# Altium PCB LEO_COTS.PcbDoc
Units mm, origin at the board's own origin, x right, y up, seen from the top; angles counter-clockwise.
Board outline 36 x 10 mm, 2 copper layers (Top Layer, Bottom Layer), stack 0.376 mm thick; 19 components, 18 nets, 99 pads, 14 vias.
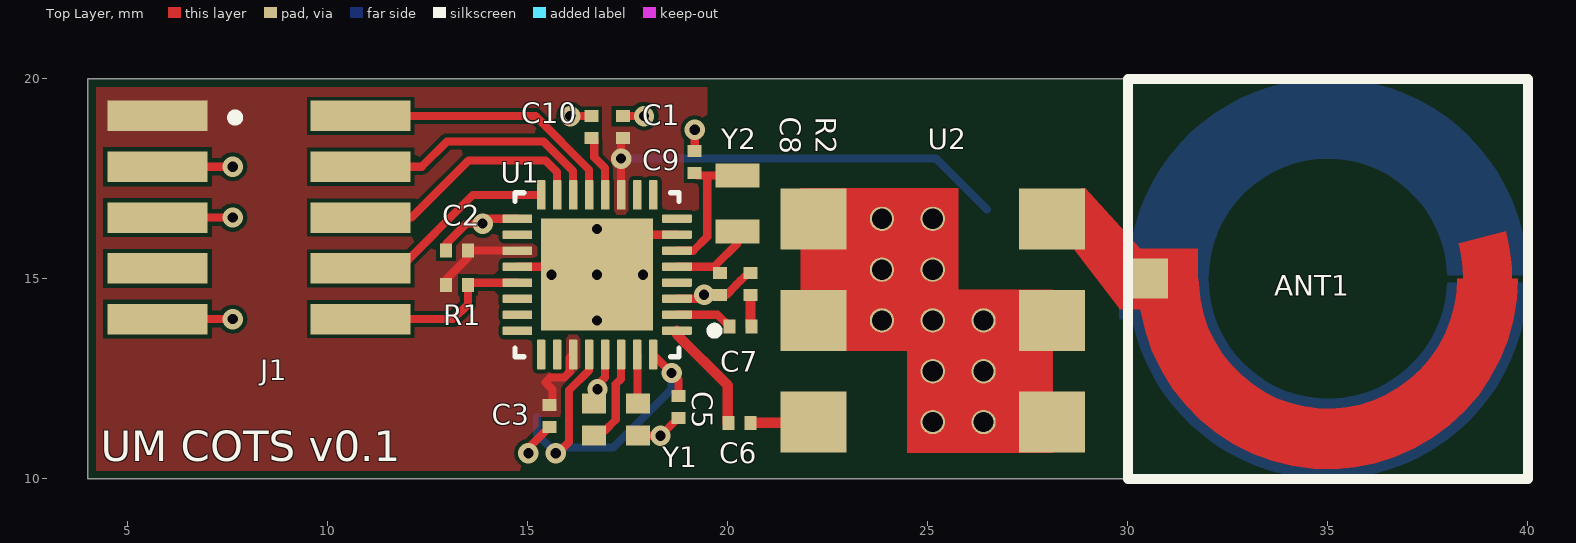
[diagram p0: Top Layer view]
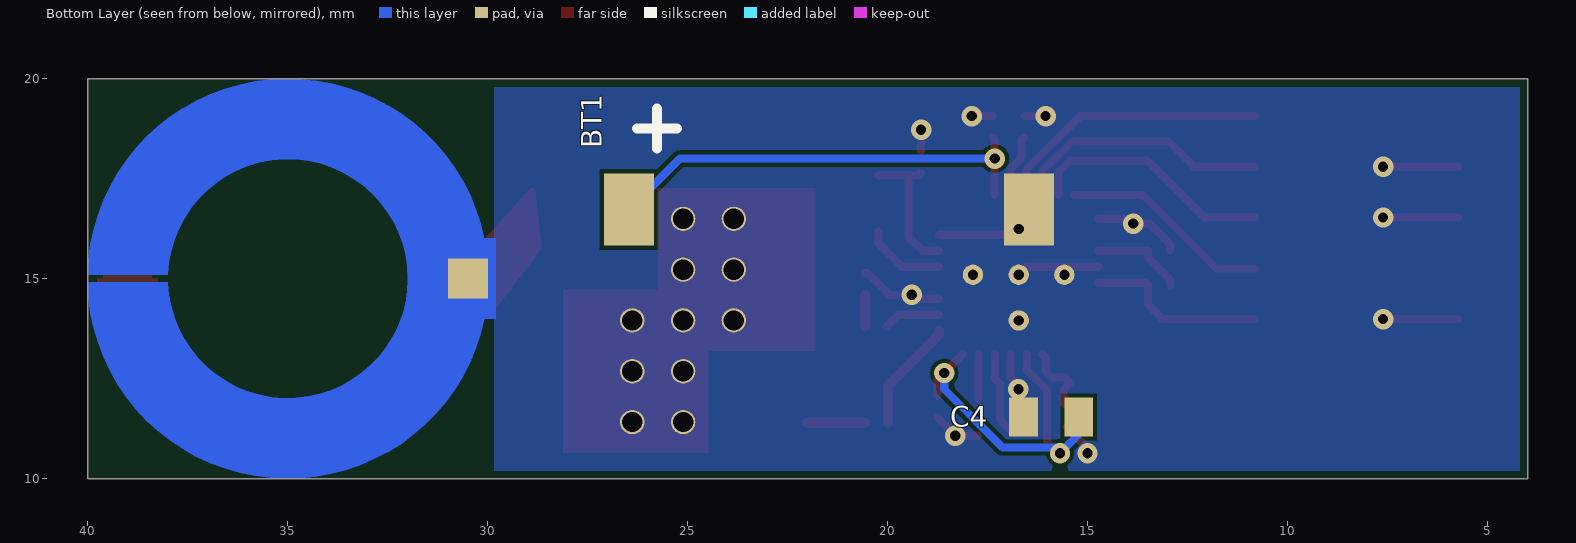
[diagram p1: Bottom Layer view, seen from below]
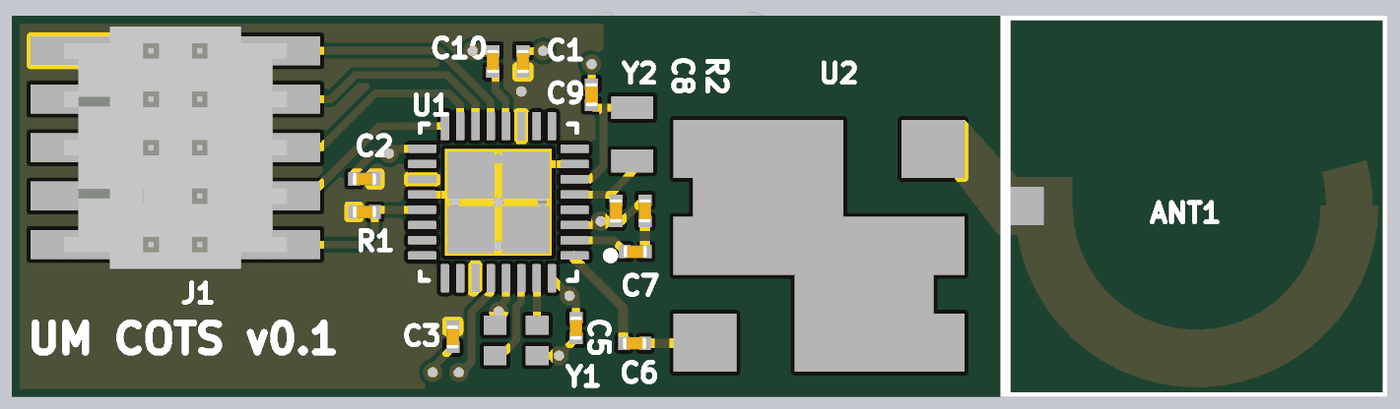
[diagram p2: 3D render of the assembled board from above, using the file's embedded part models]

## Layer stack, top to bottom
Top Solder: solder mask 0.0102, Solder Resist, Dk 3.5
Top Layer: signal copper 0.0356
Dielectric 1: core 0.3048, RO4003C-012, Dk 3.55
Bottom Layer: signal copper 0.0356
Bottom Solder: solder mask 0.0102, Solder Resist, Dk 3.5

## Board outline
4,10 40,10 40,20 4,20

## Design rules (kind name [scope] priority, off if disabled: settings)
BoardOutlineClearance BoardOutlineClearance_1 [All] p1: gap=0.203 ignorepadtopadclearanceinfootprint=FALSE
Clearance [All] p1: gap=0.102 ignorepadtopadclearanceinfootprint=FALSE
HoleSize [All] p1: absolutevalues=TRUE maxlimit=2.54 minlimit=0.203 maxpercent=80.000 minpercent=20.000
MinimumAnnularRing [All] p1: minimumring=0.203
PlaneConnect [All] p1: planeconnectstyle=Direct reliefexpansion=0.508 reliefentries=4 reliefconductorwidth=0.254 reliefairgap=0.254
PolygonConnect [All] p1: connectstyle=Direct reliefconductorwidth=0.254 reliefentries=4 polygonreliefangle="90 Angle" airgapwidth=0.254
RoutingVias [All] p1: holewidth=0.254 width=0.508 viastyle="Through Hole" minholewidth=0.203 minwidth=0.406 maxholewidth=2.286 maxwidth=2.54
SolderMaskExpansion [All] p1: expansion=0.102
Width [All] p1: maxlimit=2.54 minlimit=0.102 preferedwidth=0.102
28 further rules are at their usual default settings.

## Components (designator, comment, footprint, x,y, rotation, side; value= is the part's Value field where it differs from the comment)
ANT1 "ANT" RESLOOP_OD10_fw15_fl180_sw12_sl15 35,15.007 r180 top
BT1 "BATT" 1318164-1 21.475,16.737 r90 bottom
C1 "CAP_0201" CAPC0603X04N 17.374,18.796 r270 top value=100nF
C2 "CAP_0201" CAPC0603X04N 13.226,15.715 r0 top value=100nF
C3 "CAP_0201" CAPC0603X04N 15.537,11.575 r90 top value=100nF
C4 "CAP_0603" CAPC1608X05N 15.918,11.549 r0 bottom value=10uF
C5 "CAP_0201" CAPC0603X04N 18.763,11.803 r90 top value=100nF
C6 "CAP_0201" CAPC0603X04N 20.295,11.405 r180 top value=12pF
C7 "CAP_0201" CAPC0603X04N 20.312,13.81 r180 top value=12pF
C8 "CAP_0201" CAPC0603X04N 19.804,14.877 r90 top value=12pF
C9 "CAP_0201" CAPC0603X04N 19.169,17.925 r270 top value=12pF
C10 "CAP_0201" CAPC0603X04N 16.586,18.796 r270 top value=1uF
J1 "10-Pin JTAG" FTSH-105-01-F-DV-007-K 8.28,16.535 r0 top
R1 "Res Semi" CAPC0603X04N 13.226,14.851 r180 top value=1K
R2 "Res Semi" CAPC0603X04N 20.566,14.877 r270 top value=50
U1 "CC1350F128RSMR" QFN40P400X400X100-33N 16.731,15.105 r180 top
U2 "RMK-3-332+" RMK-3-331+ 25.121,13.962 r90 top
Y1 "830108160801" LFXTAL081608 17.196,11.481 r180 top
Y2 "ECS-.327-7-12-TR" XTAL_ECS-.327-7-12-TR 20.236,16.883 r90 top

## Footprints (in the part's own frame and the unit in brackets; to place one, negate y for a bottom-side part, rotate by r counter-clockwise, add the part's x,y. Pads: shape width x height; smd on the part's side, far side on the other; paste and mask are expansions set on the pad)
1318164-1 [mm] "BATTERY HOLDER COIN 6.8MM SMD"
  rect 1.8x1.25 smd: 1(0,5) 2(0,-5)
  silkscreen extent 1.52,3.8 2.52,4.8, body extent -3.35,-5.2 3.35,5.2, height 2.3
CAPC0603X04N [mm] "Chip Capacitor, 2-Leads, Body 0.60x0.30mm, IPC Medium Density"
  rect 0.3x0.35 smd: 1(-0.275,0) 2(0.275,0)
  body extent -0.32,-0.17 0.32,0.17, height 0.35
CAPC1608X05N [mm] "Chip Capacitor, 2-Leads, Body 1.55x0.85mm, IPC Medium Density"
  rect 0.72x0.98 smd: 1(-0.69,0) 2(0.69,0)
  body extent -0.8,-0.45 0.8,0.45, height 0.5
FTSH-105-01-F-DV-007-K [mm]
  rect 2.5x0.762 smd: 1(-2.54,2.54) 2(2.54,2.54) 3(-2.54,1.27) 4(2.54,1.27) 5(-2.54,0) 6(2.54,0) 7(-2.54,-1.27) 8(2.54,-1.27) 9(-2.54,-2.54) 10(2.54,-2.54)
  silkscreen extent -0.7,2.4 -0.5,2.6, body extent -2.92,-3.17 2.92,3.17, height 6.1
LFXTAL081608 [mm] "1.6mm x 1.2mm SMD crystal"
  rect 0.6x0.5 smd: 1(-0.55,-0.4) 2(0.55,-0.4) 3(0.55,0.4) 4(-0.55,0.4)
  body extent -0.8,-0.6 0.8,0.6, height 0.4
QFN40P400X400X100-33N [mm]
  rrect25% 0.74x0.22 smd: 1(-1.995,1.4) 2(-1.995,1) 3(-1.995,0.6) 4(-1.995,0.2) 5(-1.995,-0.2) 6(-1.995,-0.6) 7(-1.995,-1) 8(-1.995,-1.4) 17(1.995,-1.4) 18(1.995,-1) 19(1.995,-0.6) 20(1.995,-0.2) 21(1.995,0.2) 22(1.995,0.6) 23(1.995,1) 24(1.995,1.4)
  rrect25% 0.22x0.74 smd: 9(-1.4,-1.995) 10(-1,-1.995) 11(-0.6,-1.995) 12(-0.2,-1.995) 13(0.2,-1.995) 14(0.6,-1.995) 15(1,-1.995) 16(1.4,-1.995) 25(1.4,1.995) 26(1,1.995) 27(0.6,1.995) 28(0.2,1.995) 29(-0.2,1.995) 30(-0.6,1.995) 31(-1,1.995) 32(-1.4,1.995)
  round 0.508 hole 0.254: 33(-1.143,0) 33(0,1.143) 33(0,0) 33(0,-1.143) 33(1.143,0)
  rect 2.8x2.8 smd paste-2: 33(0,0)
  silkscreen extent -3.04,-2.05 2.05,2.05, body extent -2,-2 2,2, height 1
RESLOOP_OD10_fw15_fl180_sw12_sl15 [mm] "Microstrip resonant planar loop"
  rect 1x1 smd mask+0.102: 1(4.5,0)
  rect 1x1 smd far side mask+0.102: 2(4.5,0)
  Top Layer region: -4.75,0 -4.6,0 -4.561,-0.6 -4.443,-1.191 -4.443,-1.191 -3.284,-0.88 -3.371,-0.444 -3.4,0 -3.4,0 -3.25,0 -3.23,0.356 -3.172,0.709 -3.075,1.052 -2.941,1.383 -2.772,1.697 -2.569,1.991 -2.335,2.261 -2.073,2.503 -1.786,2.715 -1.477,2.895 -1.151,3.039 -0.81,3.147 -0.46,3.217 -0.105,3.248 0.252,3.24 0.606,3.193 0.953,3.107 1.288,2.984 1.607,2.825 1.907,2.632 2.184,2.406 2.435,2.152 2.656,1.872 2.846,1.57 3.001,1.248 3.12,0.912 3.208,0.52 3.248,0.12 3.25,0.009 3.25,-0.003 3.25,-0.75 5.2,-0.75 5.2,0.75 4.69,0.75 4.559,1.332 4.386,1.824 4.159,2.294 3.882,2.737 3.559,3.146 3.192,3.517 2.787,3.846 2.349,4.129 1.882,4.361 1.392,4.541 0.886,4.667 0.368,4.736 -0.153,4.748 -0.673,4.702 -1.185,4.6 -1.682,4.442 -2.159,4.231 -2.61,3.969 -3.029,3.659 -3.412,3.304 -3.754,2.91 -4.051,2.481 -4.298,2.021 -4.494,1.538 -4.636,1.036 -4.721,0.521
  Top Layer lines w0.013: 5.2,0.75 5.2,-0.75 3.25,-0.75 3.25,-0.401 3.25,-0.072 3.25,-0.017 3.25,-0.003 3.25,0.009 3.248,0.12 3.208,0.52 3.12,0.912 3.001,1.248 2.846,1.57 2.656,1.872 2.435,2.152 2.184,2.406 1.907,2.632 1.607,2.825 1.288,2.984 0.953,3.107 0.606,3.193 0.252,3.24 -0.105,3.248 -0.46,3.217 -0.81,3.147 -1.151,3.039 -1.477,2.895 -1.786,2.715 -2.073,2.503 -2.335,2.261 -2.569,1.991 -2.772,1.697 -2.941,1.383 -3.075,1.052 -3.172,0.709 -3.23,0.356 -3.25,0 -3.4,0 ccw(c0,0) -3.284,-0.88 -4.443,-1.191 cw(c0,0) -4.6,0 -4.75,0 -4.721,0.521 -4.636,1.036 -4.494,1.538 -4.298,2.021 -4.051,2.481 -3.754,2.91 -3.412,3.304 -3.029,3.659 -2.61,3.969 -2.159,4.231 -1.682,4.442 -1.185,4.6 -0.673,4.702 -0.153,4.748 0.368,4.736 0.886,4.667 1.392,4.541 1.882,4.361 2.349,4.129 2.787,3.846 3.192,3.517 3.559,3.146 3.882,2.737 4.159,2.294 4.386,1.824 4.559,1.332 4.69,0.75 5.2,0.75
  Bottom Layer region: -4.999,-0.1 -2.998,-0.1 -2.555,-1.572 -1.442,-2.631 0.05,-3 1.529,-2.581 2.606,-1.486 3,0 2.606,1.486 1.529,2.581 0.05,3 -1.442,2.631 -2.555,1.572 -2.998,0.1 -2.998,0.1 -4.999,0.1 -4.372,2.427 -2.729,4.189 -0.453,4.979 1.929,4.613 3.862,3.175 4.899,1 4.899,1 5.2,1 5.2,-1 4.899,-1 3.862,-3.175 1.929,-4.613 -0.453,-4.979 -2.729,-4.189 -4.372,-2.427 -4.999,-0.1
  Bottom Layer lines w0.013: 5.2,1 5.2,-1 4.899,-1 cw(c0,0) -4.999,-0.1 -2.998,-0.1 ccw(c0,0) -2.998,0.1 -4.999,0.1 cw(c0,0) 4.899,1 5.2,1
RMK-3-331+ [mil] "MiniCircuits TT12245 case"
  rect 60x65 smd: 1(-100,117.5) 2(0,117.52) 3(100,117.5) 4(100,-117.5) 5(0,-117.5) 6(-100,-117.5)
  round 24 hole 20 mask+4: 3(-100,-50) 3(-100,0) 3(-50,-50) 3(-50,0) 3(0,50) 3(0,0) 3(0,-50) 3(50,0) 3(50,50) 3(100,0) 3(100,50)
  Top Layer region: -130,25 -130,-118.11 30,-118.11 30,-25 130,-25 130,129.92 -30,129.92 -30,25
  body extent -155,-130 155,130, height 160
XTAL_ECS-.327-7-12-TR [mm]
  rect 0.6x1.1 smd: 1(-0.7,0) 2(0.7,0)
  body extent -1,-0.6 1,0.6, height 0.25

## Part data
BT1: Supplier Part Number 1=A108890CT-ND, Supplier 1=Digi-Key
C1 C2 C3 C5 C6 C7 C8 C9 C10: "CAP CER 0201"
C4: "CAP CER 0603"
J1: library part CM10, Supplier Part Number 1=FTSH-105-01-L-DV-007-K-P-ND, Supplier 1=Digi-Key
R1 R2: "Semiconductor Resistor", LatestRevisionDate=17-Jul-2002, LatestRevisionNote="Re-released for DXP Platform.", PackageDescription="Axial Device, Thru-Hole; 2 Leads; 0.5 in Pin Spacing", PackageReference=AXIAL-0.5, Published=8-Jun-2000, Publisher="Altium Limited"
U1: "Ultra-Low-Power Dual-Band Wireless MCU"
U2: "3x Frequency Multiplier"
Y1: "24 MHz crystal", Package=None, Availability=Unavailable, MP=ECS-.327-7-12-TR, Price=None
Y2: "32.768 kHz SMD Crystal", Package=None, Availability=Unavailable, MP=ECS-.327-7-12-TR, Price=None

## Via types
v1: diameter 0.508, hole 0.254, Top Layer to Bottom Layer, tented both sides, 14 vias

## Nets (pads, with @x,y where several pads share a name; then routed paths per layer and width w, separated by ;. In a path a pad name is that pad's centre, name@x,y a point inside that pad or via, vN(x,y) a via of type N, cw(c..) or ccw(c..) an arc to the next point about the centre after c; other vN are vias at no path point)
GND: ANT1.2 BT1.2 C1.1 C2.1 C3.1 C4.2 C5.1 C8.1 C9.1 C10.1 J1.3 J1.5 J1.9 R2.1 U1.3 U1.7 U1.17 U1.20 U1.29 U1.33 U2.2 U2.3 U2.5 U2.6 Y1.2 Y1.4 | length 18.1
  Top Layer w0.203: J1.9 v1(7.62,13.995) ; J1.5 v1(7.62,16.535) ; J1.3 v1(7.62,17.805) ; C2.1 12.951,15.872 13.462,16.383 v1(13.868,16.383) 13.991,16.505 U1.17 ; U1.20 16.531,15.305 U1.33@16.731,15.105 ; v1(15.011,10.643) 15.011,10.774 C3.1 ; v1(16.057,19.071) C10.1 ; v1@16.646,12.252 16.931,12.537 U1.29 ; U1.33@16.931,16.105 U1.7 ; C1.1 v1(17.903,19.071) ; Y1.4 v1(18.315,11.081) C5.1 ; U1.3 19.255,14.505 19.355,14.605 v1(19.406,14.605) ; C9.1 v1(19.169,18.729) ; C8.1 19.961,14.602 20.188,14.829 20.188,14.836 20.307,14.955 20.314,14.955 20.511,15.152 R2.1
  other v1: 16.739,12.243
JTAG_RSTN: J1.10 R1.1 U1.21 | length 4.6
  Top Layer w0.203: J1.10 13.132,13.995 13.501,14.364 R1.1 13.555,14.905 U1.21
JTAG_TCK: J1.4 U1.14 | length 6.5
  Top Layer w0.203: J1.4 12.344,17.805 12.979,18.44 15.391,18.44 16.131,17.7 U1.14
JTAG_TDI: J1.8 U1.16 | length 5.3
  Top Layer w0.203: J1.8 11.786,15.265 13.621,17.1 U1.16
JTAG_TDO: J1.6 U1.15 | length 6.2
  Top Layer w0.203: J1.6 12.09,16.535 13.513,17.958 15.442,17.958 15.731,17.669 U1.15
JTAG_TMS: J1.2 U1.13 | length 6.9
  Top Layer w0.203: J1.2 15.187,19.075 16.531,17.731 U1.13
NetANT1_1: ANT1.1 U2.4
NetC4_1: C4.1 C5.2 U1.28 U1.32 | length 9.1
  Top Layer w0.203: v1(15.697,10.643) 15.723,10.617 16.027,10.922 16.027,12.217 16.523,12.713 16.523,13.102 U1.28 ; U1.32 v1(18.593,12.649) 18.763,12.478 C5.2
  Bottom Layer w0.203: C4.1 15.228,11.112 15.557,10.782 17.132,10.782 18.593,12.243 v1(18.593,12.649)
NetC6_1: C6.1 U2.1 | length 1.4
  Top Layer w0.254: C6.1 U2.1@22.016,11.405
NetC6_2: C6.2 U1.1 | length 2.8
  Top Layer w0.254: U1.1 18.726,13.608 19.994,12.34 C6.2@19.994,11.405
NetC7_1: C7.1 R2.2 | length 0.8
  Top Layer w0.254: R2.2 20.566,13.831 C7.1
NetC7_2: C7.2 U1.2 | length 1.4
  Top Layer w0.203: U1.2 19.742,14.105 C7.2
NetC8_2: C8.2 U1.5 Y2.1 | length 2
  Top Layer w0.203: U1.5 19.651,15.305 20.236,15.891 Y2.1
NetC9_2: C9.2 U1.6 Y2.2 | length 3.5
  Top Layer w0.203: U1.6 19.134,15.705 19.482,16.053 19.482,17.583 ; C9.2 19.236,17.583 19.482,17.583 ; Y2.2 19.482,17.583
NetC10_2: C10.2 U1.12 | length 1.6
  Top Layer w0.203: C10.2 16.611,18.521 16.66,18.473 16.66,18.033 16.923,17.77 16.923,17.109 U1.12
NetU1_30: U1.30 Y1.3 | length 2.4
  Top Layer w0.203: Y1.3@16.638,11.2 16.915,11.2 17.196,11.481 17.196,12.371 17.323,12.497 17.323,13.102 U1.30
NetU1_31: U1.31 Y1.1 | length 1.1
  Top Layer w0.203: U1.31 17.738,13.103 Y1.1@17.738,12
VDDS: BT1.1 C1.2 C2.2 C3.2 J1.1 R1.2 U1.11 U1.19 U1.27 | length 15.3
  Top Layer w0.203: R1.2 12.951,14.983 13.501,15.533 C2.2 14.726,15.715 U1.19 ; C3.2 15.562,11.85 15.611,11.898 15.611,12.239 15.435,12.414 15.558,12.537 15.909,12.537 16.044,12.672 16.044,13.024 U1.27 ; U1.11 v1(17.331,18.009) 17.331,18.478 C1.2
  Bottom Layer w0.203: v1(17.331,18.009) 25.203,18.009 BT1.1
pads on no net: J1.7 U1.4 U1.8 U1.9 U1.10 U1.18 U1.22 U1.23 U1.24 U1.25 U1.26

## Polygon pours and split planes (outlines as drawn)
GND on Bottom Layer (solid, pour order 2): 29.845,10 29.845,19.99 4,20 4,10.008
VDDS on Top Layer (solid, pour order 6): 17.602,10.008 17.602,14.173 19.482,16.053 19.482,20 3.988,20 3.988,10.008

## Other copper
Top Layer:
  region net NetANT1_1: 28.651,15.757 29.8,14.257 30.31,14.257 30.328,15.757 30.31,15.757 28.938,17.264 28.829,17.264

## Silkscreen, mask and mechanical layers (free items; w line width, h text height)
Top Overlay:
  lines w0.254: 30,10 40,10 40,20 30,20 30,10
  text "UM COTS v0.1" at 4.318,10.439 h0.76
Mechanical 5 (Mech5):
  the board outline again, w0.254